# Altium PCB CH32V103R-R1-1v1.PcbDoc (part 1 of 2)
Units mil, origin at the board's own origin, x right, y up, seen from the top; angles counter-clockwise.
Board outline 2913.39 x 3002 mil, 2 copper layers (Top Layer, Bottom Layer); 62 components, 91 nets, 361 pads, 452 vias.
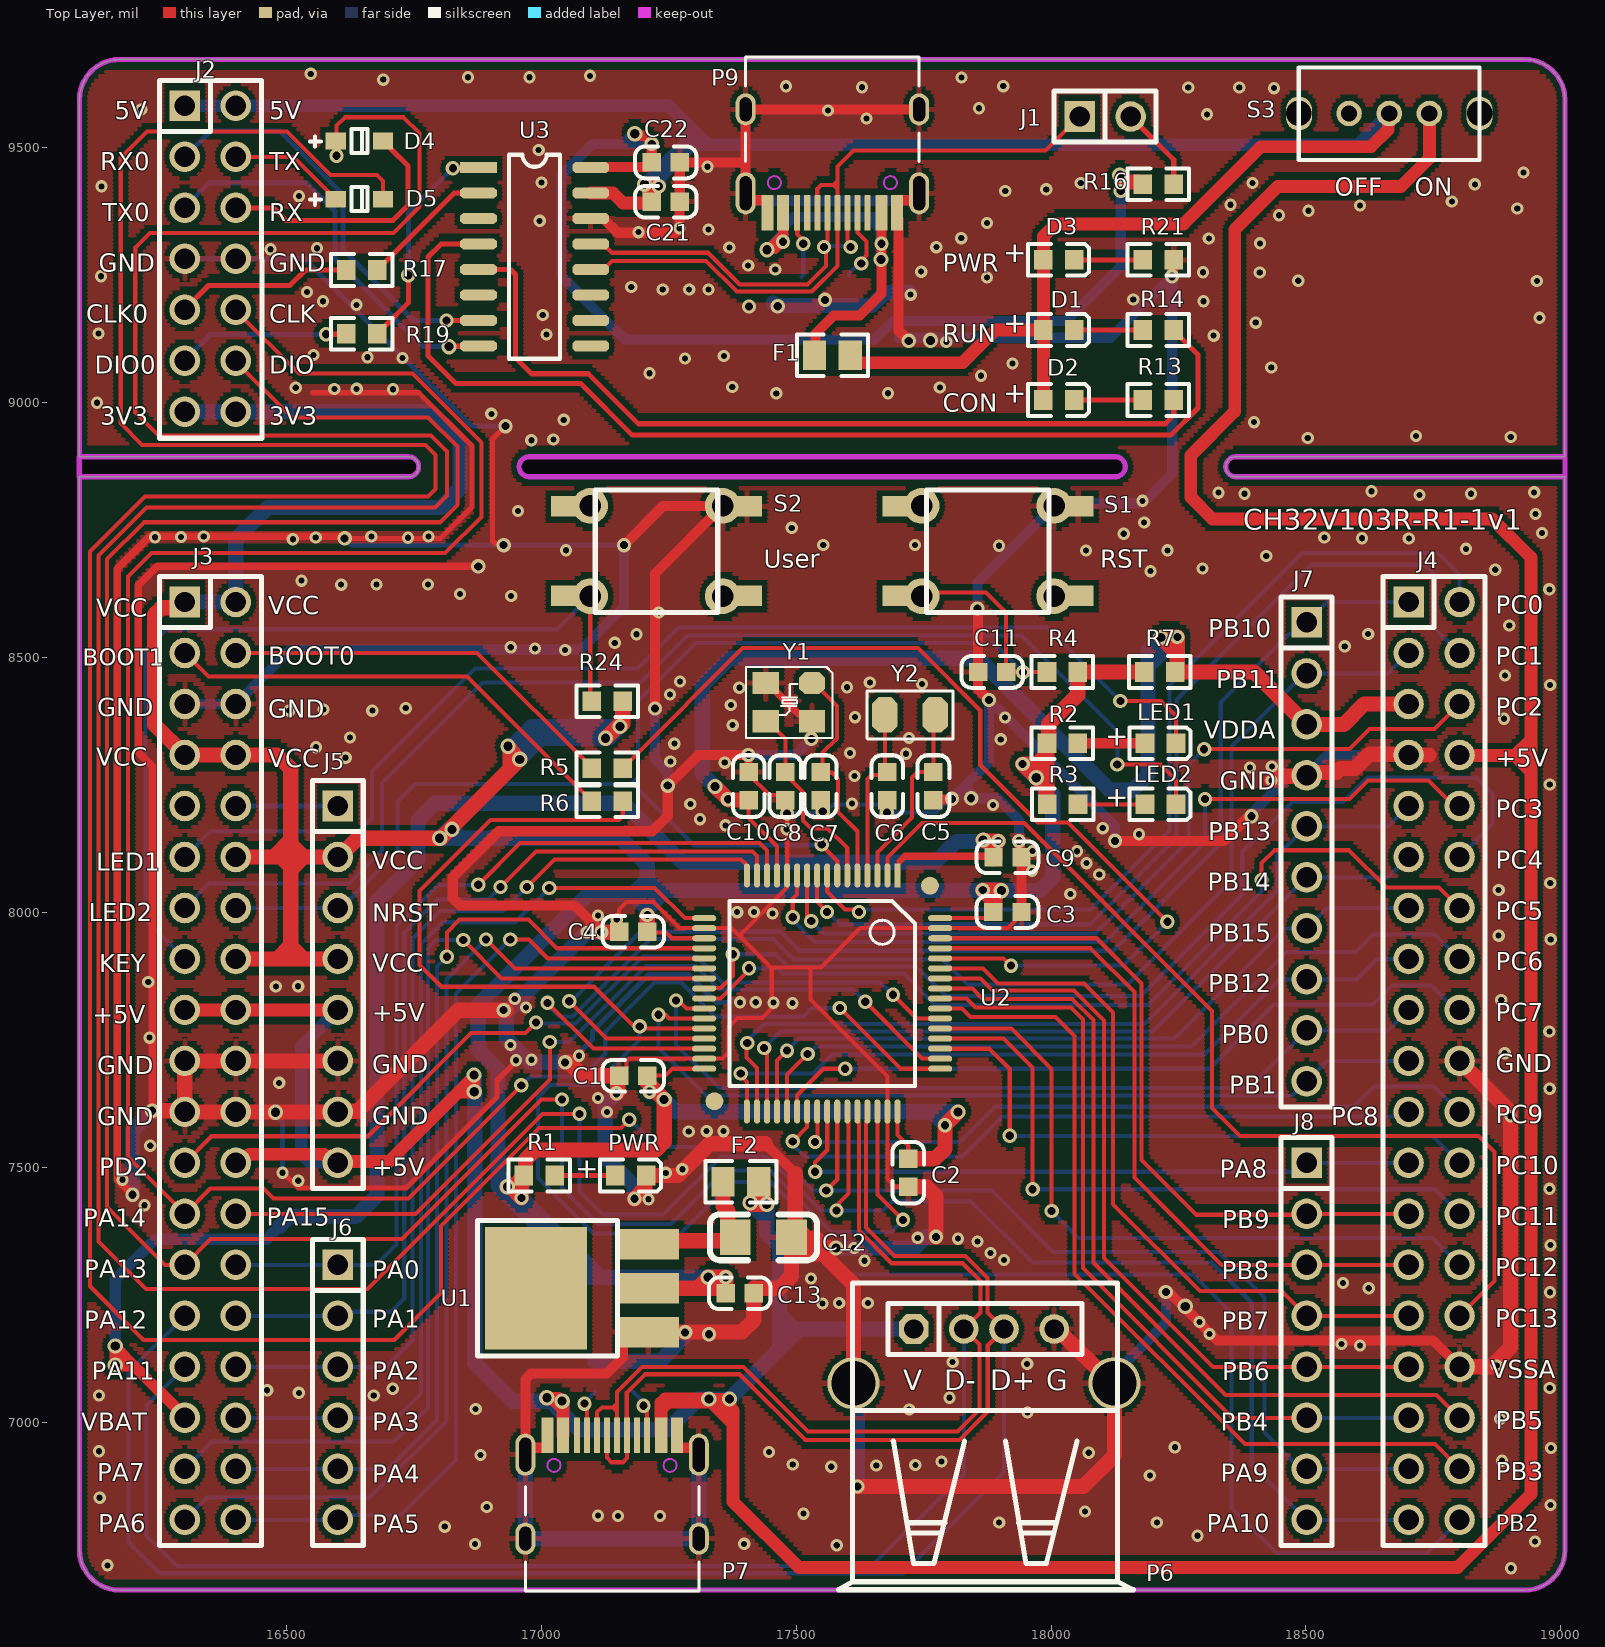
[diagram p0: Top Layer view]
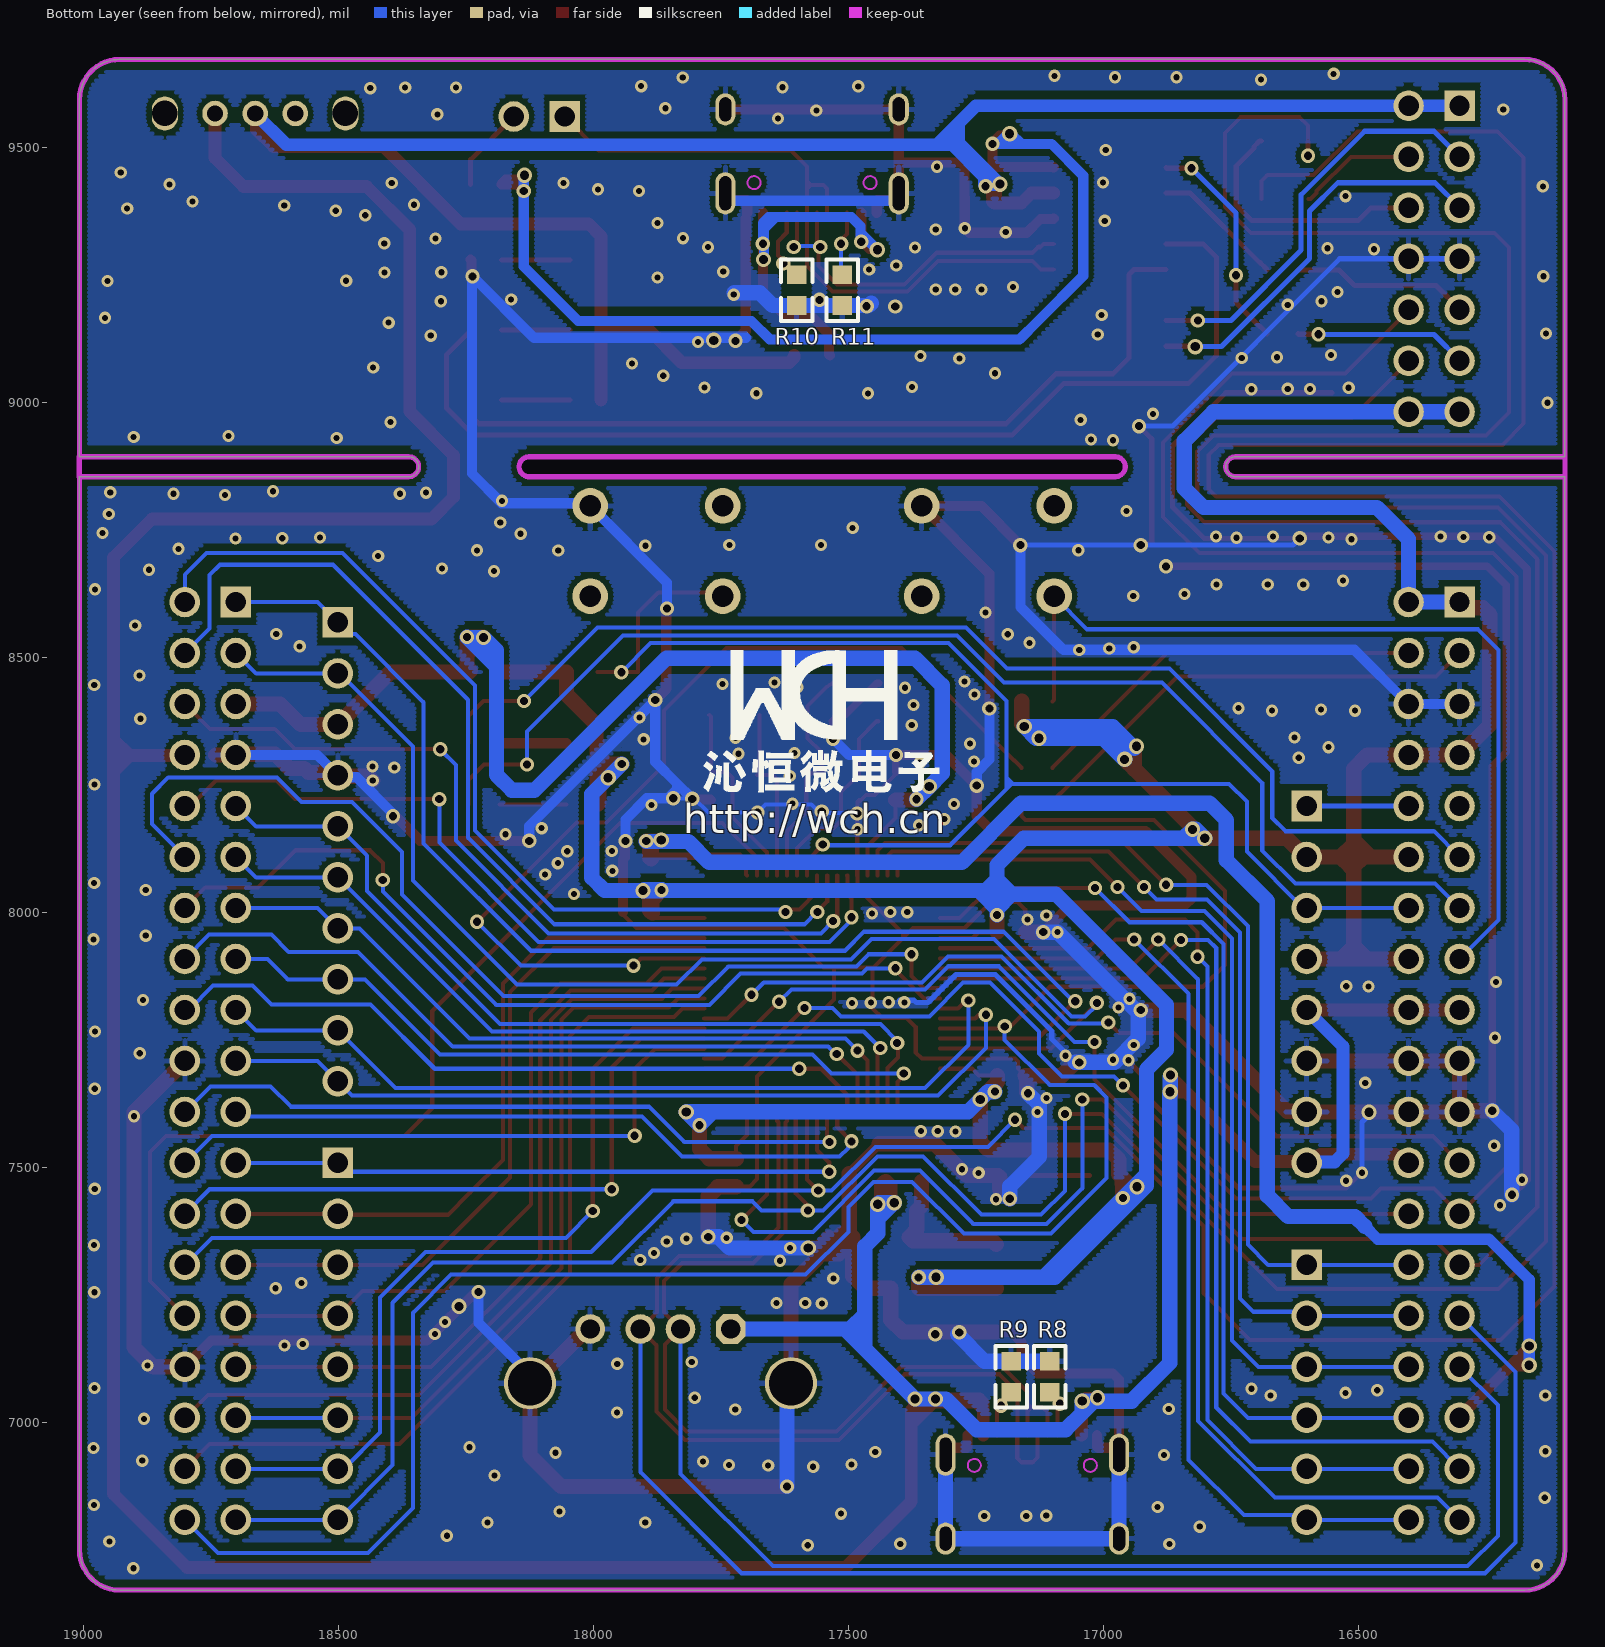
[diagram p1: Bottom Layer view, seen from below]

## Layer stack, top to bottom
Top Solder: solder mask 0.4, Solder Resist, Dk 3.5
Top Layer: signal copper 1.4
Dielectric 1: dielectric 12.6, FR-4, Dk 4.8
Bottom Layer: signal copper 1.4
Bottom Solder: solder mask 0.4, Solder Resist, Dk 3.5

## Board outline
16094.48,6749.74 ccw(c16173.22,6749.74) 16173.22,6671 18929.12,6671 ccw(c18929.12,6749.74) 19007.86,6749.74 19007.86,8854.48 18362.2,8854.48 cw(c18362.2,8874.16) 18362.2,8893.85 19007.86,8893.85 19007.86,9594.26 ccw(c18929.12,9594.26) 18929.12,9673 16173.22,9673 ccw(c16173.22,9594.26) 16094.48,9594.26 16094.48,8893.85 16740.15,8893.85 cw(c16740.15,8874.16) 16740.15,8854.48 16094.48,8854.48
cut-out: 16976.37,8854.48 cw(c16976.37,8874.16) 16976.37,8893.85 18125.97,8893.85 cw(c18125.97,8874.16) 18125.97,8854.48

## Design rules (kind name [scope] priority, off if disabled: settings)
Clearance Clearance_1 [InPolygon] p1: gap=10 ignorepadtopadclearanceinfootprint=FALSE
Clearance [All] p2: gap=6 ignorepadtopadclearanceinfootprint=FALSE
ComponentClearance [All] p1 off: gap=10 collisioncheckmode=3 verticalgap=10 showdistances=FALSE
DiffPairsRouting [All] p1: maxlimit=10 minlimit=7 mostfreqgap=8 toplayer_minwidth=6 toplayer_maxwidth=15 toplayer_prefwidth=8 bottomlayer_minwidth=6 bottomlayer_maxwidth=15 bottomlayer_prefwidth=8 maxuncoupledlength=500
MinimumSolderMaskSliver [All] p1 off: minsoldermaskwidth=10
PolygonConnect PolygonConnect_1 [IsVia] p1: connectstyle=Direct reliefconductorwidth=10 reliefentries=4 polygonreliefangle="90 Angle" airgapwidth=10
PolygonConnect [All] p2: connectstyle=Relief reliefconductorwidth=10 reliefentries=4 polygonreliefangle="90 Angle" airgapwidth=10
RoutingVias [All] p1: holewidth=16 width=28 viastyle="Through Hole" minholewidth=12 minwidth=24 maxholewidth=28 maxwidth=50
SilkToSilkClearance [All] p1 off: silktosilkclearance=10
SilkToSolderMaskClearance [IsPad] p1 off: minsilkscreentomaskgap=10 clearancetoexposedcopper=TRUE
SolderMaskExpansion [All] p1: expansion=4 istentingtop=FALSE
Width [All] p1: maxlimit=100 minlimit=6 preferedwidth=10
25 further rules are at their usual default settings.

## Components (designator, comment, footprint, x,y, rotation, side; value= is the part's Value field where it differs from the comment)
C1 "0.1uF" 0603_C 17153,7680 r0 top
C2 "0.1uF" 0603_C 17720,7462 r90 top
C3 "0.1uF" 0603_C 17942,8001 r180 top
C4 "0.1uF" 0603_C 17153,7962 r0 top
C5 "12pF" 0603_C 17769.31,8275.39 r270 top
C6 "12pF" 0603_C 17678.83,8275.39 r270 top
C7 "22pF" 0603_C 17548,8220.4 r90 top
C8 "22pF" 0603_C 17479,8220.4 r90 top
C9 "0.1uF" 0603_C 17887.02,8108.24 r0 top
C10 "0.1uF" 0603_C 17407,8220.4 r90 top
C11 "0.1uF" 0603_C 17857.02,8471.72 r0 top
C12 "10uF" 3216_C 17381,7363 r180 top
C13 "10uF" 0603_C 17362,7253 r0 top
C21 "0.1uF" 0603_C 17217,9394 r0 top
C22 "0.1uF" 0603_C 17217,9471 r0 top
D1 "GREEN" 0603+ 17985,9142.5 r0 top
D2 "BLUE" 0603+ 17985,9005 r0 top
D3 "RED" 0603+ 17985,9280 r0 top
D4 "B0520" SOD-323 16597.09,9513 r0 top
D5 "B0520" SOD-323 16597.09,9399 r0 top
F1 "500mA" 0805 17536.04,9092.5 r0 top
F2 "500mA" 0805 17426.63,7472 r180 top
J1 "Header 2" SIP2-2.54MM 18056,9561 r90 top
J2 "Header 7X2" IDC14-2.54mm 16301.17,9582 r0 top
J3 "Header 19X2" IDC38-2.54mm 16301.17,8608.81 r0 top locked
J4 "Header 19X2" IDC38-2.54mm 18701.17,8608.81 r0 top locked
J5 "Header 8" SIP8-2.54mm 16601.17,8208.81 r0 top locked
J6 "Header 6" SIP6-2.54MM 16601.17,7308.81 r0 top locked
J7 "Header 10" SIP10-2.54mm 18501.17,8568.81 r0 top locked
J8 "Header 8" SIP8-2.54mm 18501.17,7508.81 r0 top locked
LED1 "LED1   blue" 0603+ 18184.37,8332 r0 top
LED2 "LED2  blue" 0603+ 18184.37,8212 r0 top
P6 "USB_A" USBAF 17730.57,7183.06 r0 top
P7 "TYPE-C" TYPE-C-Receptacle-2.0 17139.08,6974.76 r0 top
P9 "TYPE-C" TYPE-C-Receptacle-2.0 17571.08,9372.24 r180 top
PWR "POWER  red" 0603+ 17145.56,7484 r0 top
R1 "1K" 0603 17026.69,7484 r180 top
R2 "1K" 0603 17992,8332 r0 top
R3 "1K" 0603 17992.37,8212 r0 top
R4 "10K" 0603 17992,8471.72 r0 top
R5 "10K" 0603 17099.37,8283 r0 top
R6 "10K" 0603 17160,8218 r180 top
R7 "0Ω" 0603 18182.99,8471.72 r0 top
R8 "NC(5.1K)" 0603 17104.92,7119.74 r270 bottom
R9 "NC(5.1K)" 0603 17180.53,7119.74 r270 bottom
R10 "NC(5.1K)" 0603 17601.22,9250.91 r270 bottom
R11 "NC(5.1K)" 0603 17511.88,9250.91 r270 bottom
R13 "1K" 0603 18240.63,9005 r180 top
R14 "10K" 0603 18240.63,9142.5 r180 top
R16 "4.7K" 0603 18240.63,9427.99 r180 top
R17 "270" 0603 16618,9260 r0 top
R19 "270" 0603 16618,9135 r0 top
R21 "1K" 0603 18240.63,9280 r180 top
R24 "10K" 0603 17099.37,8414 r0 top
S1 "RESET(Yellow)" KEYX 17746.25,8620.23 r90 top locked
S2 "USER(Blue)" KEYX 17096.25,8620.23 r90 top locked
S3 "SW" KEY2 18505.78,9567 r0 top
U1 "1117-3.3V" SOT-223 17210,7177 r90 top
U2 "CH32V103R" LQFP64M_10X10 17698.81,8072.55 r180 top
U3 "CH549G" SOP16 16877,9461 r270 top
Y1 "8M" XT3225 17531,8449.8 r180 top
Y2 "32.768k" FC-135 17772.64,8387.51 r180 top

## Footprints (in the part's own frame and the unit in brackets; to place one, negate y for a bottom-side part, rotate by r counter-clockwise, add the part's x,y. Pads: shape width x height; smd on the part's side, far side on the other; paste and mask are expansions set on the pad)
0603 [mm]
  rect 0.93x0.98 smd: 1(0,0) 2(1.54,0)
  silkscreen extent -0.76,-0.79 2.3,0.79
0603+ [mm]
  rect 0.93x0.98 smd: 1(0,0) 2(1.54,0)
  silkscreen extent -0.76,-0.79 2.27,0.79
0603_C [mil]
  rect 36x36 smd: 1(0,0) 2(55,0)
  silkscreen extent -33,-31 88,31
0805 [mm]
  rect 1.16x1.47 smd: 1(0,0) 2(1.78,0)
  silkscreen extent -0.88,-1.04 2.66,1.03
3216_C [mil]
  rect 60x70 smd: 1(0,0) 2(-110,0)
  silkscreen extent -160,-45 50,45
FC-135 [mil]
  oct 50x70 smd: 1(0,0) 2(98.43,0)
  silkscreen extent -35,-47 133,47
IDC14-2.54mm [mil]
  rect 60x60 hole 40: 1(0,0)
  round 60 hole 40: 2(100,0) 3(0,-100) 4(100,-100) 5(0,-200) 6(100,-200) 7(0,-300) 8(100,-300) 9(0,-400) 10(100,-400) 11(0,-500) 12(100,-500) 13(0,-600) 14(100,-600)
  silkscreen extent -50,-652 151,50
IDC38-2.54mm [mil]
  rect 60x60 hole 40: 1(0,0)
  round 60 hole 40: 2(100,0) 3(0,-100) 4(100,-100) 5(0,-200) 6(100,-200) 7(0,-300) 8(100,-300) 9(0,-400) 10(100,-400) 11(0,-500) 12(100,-500) 13(0,-600) 14(100,-600) 15(0,-700) 16(100,-700) 17(0,-800) 18(100,-800) 19(0,-900) 20(100,-900) 21(0,-1000) 22(100,-1000) 23(0,-1100) 24(100,-1100) 25(0,-1200) 26(100,-1200) 27(0,-1300) 28(100,-1300) 29(0,-1400) 30(100,-1400) 31(0,-1500) 32(100,-1500) 33(0,-1600) 34(100,-1600) 35(0,-1700) 36(100,-1700) 37(0,-1800) 38(100,-1800)
  silkscreen extent -50,-1850 150,50
KEY2 [mm]
  oval 1.3x1.7 hole 1.27: 0(-0.5,0) 0(8.5,0)
  round 1.27 hole 0.813: 1(4,0) 2(2,0) 3(6,0)
  silkscreen extent -0.51,-2.31 8.5,2.29
KEYX [mil]
  round 70 hole 42: 1(0,0) 2(0,-259.84) 3(177.17,-259.84) 4(177.17,0)
  silkscreen extent -32,-250 208,-10
LQFP64M_10X10 [mm]
  round 0.889 smd: 0(-1.619,0.508) 0(9.119,11.246)
  rect 0.3x1.2 smd: 1(0,0)
  oval 0.3x1.2 smd: 2(0.5,0) 3(1,0) 4(1.5,0) 5(2,0) 6(2.5,0) 7(3,0) 8(3.5,0) 9(4,0) 10(4.5,0) 11(5,0) 12(5.5,0) 13(6,0) 14(6.5,0) 15(7,0) 16(7.5,0) 33(7.5,11.754) 34(7,11.754) 35(6.5,11.754) 36(6,11.754) 37(5.5,11.754) 38(5,11.754) 39(4.5,11.754) 40(4,11.754) 41(3.5,11.754) 42(3,11.754) 43(2.5,11.754) 44(2,11.754) 45(1.5,11.754) 46(1,11.754) 47(0.5,11.754) 48(0,11.754)
  oval 1.2x0.3 smd: 17(9.627,2.127) 18(9.627,2.627) 19(9.627,3.127) 20(9.627,3.627) 21(9.627,4.127) 22(9.627,4.627) 23(9.627,5.127) 24(9.627,5.627) 25(9.627,6.127) 26(9.627,6.627) 27(9.627,7.127) 28(9.627,7.627) 29(9.627,8.127) 30(9.627,8.627) 31(9.627,9.127) 32(9.627,9.627) 49(-2.127,9.627) 50(-2.127,9.127) 51(-2.127,8.627) 52(-2.127,8.127) 53(-2.127,7.627) 54(-2.127,7.127) 55(-2.127,6.627) 56(-2.127,6.127) 57(-2.127,5.627) 58(-2.127,5.127) 59(-2.127,4.627) 60(-2.127,4.127) 61(-2.127,3.627) 62(-2.127,3.127) 63(-2.127,2.627) 64(-2.127,2.127)
  silkscreen extent -0.86,1.26 8.37,10.49
SIP2-2.54MM [mil]
  rect 60x60 hole 40: 1(0,0)
  round 60 hole 40: 2(0,-100)
  silkscreen extent -50,-150 50,50
SIP6-2.54MM [mil]
  rect 60x60 hole 40: 1(0,0)
  round 60 hole 40: 2(0,-100) 3(0,-200) 4(0,-300) 5(0,-400) 6(0,-500)
  silkscreen extent -50,-550 50,50
SIP8-2.54mm [mil]
  rect 60x60 hole 40: 1(0,0)
  round 60 hole 40: 2(0,-100) 3(0,-200) 4(0,-300) 5(0,-400) 6(0,-500) 7(0,-600) 8(0,-700)
  silkscreen extent -50,-750 50,50
SIP10-2.54mm [mil]
  rect 60x60 hole 40: 1(0,0)
  round 60 hole 40: 2(0,-100) 3(0,-200) 4(0,-300) 5(0,-400) 6(0,-500) 7(0,-600) 8(0,-700) 9(0,-800) 10(0,-900)
  silkscreen extent -50,-950 50,50
SOD-323 [mm]
  rect 1x0.83 smd: 1(0,0) 2(2.36,0)
  silkscreen extent -1.28,-0.6 1.58,0.6
SOP16 [mil]
  rect 22x72 smd: 1(0,0)
  oct 22x72 smd: 2(50,0) 3(100,0) 4(150,0) 5(200,0) 6(250,0) 7(300,0) 8(350,0) 9(350,220) 10(300,220) 11(250,220) 12(200,220) 13(150,220) 14(100,220) 15(50,220) 16(0,220)
  silkscreen extent -25,60 375,160
SOT-223 [mil]
  rect 60x120 smd: 1(0,0) 2(86,0) 3(172,0)
  rect 240x200 smd: ""(86,220)
  silkscreen extent -47,60 219,335
TYPE-C-Receptacle-2.0 [mm]
  oval 1x1.6 hole 0.6 slot 1.2 at 90 deg: 0(-4.32,-5.15) 0(4.32,-5.15)
  oval 1x2.1 hole 0.6 slot 1.7 at 90 deg: 0(-4.32,-0.97) 0(4.32,-0.97)
  rect 0.6x1.75 smd: A1(-3.225,0) A4(-2.45,0) B1(3.225,0) B4(2.45,0)
  rect 0.3x1.75 smd: A5(-1.25,0) A6(-0.25,0) A7(0.25,0) A8(1.25,0) B5(1.75,0) B6(0.75,0) B7(-0.75,0) B8(-1.75,0)
  Keep-Out Layer circle w0.1: c2.89,-1.5 r0.325
  Keep-Out Layer circle w0.1: c-2.89,-1.5 r0.325
  silkscreen extent -4.32,-7.75 4.32,-2.55
USBAF [mm]
  round 2.6 hole 2.2: 0(-3,-2.7) 0(10,-2.7)
  oct 1.473x1.473 hole 0.965: 1(0,0)
  round 1.473 hole 0.965: 2(2.5,0) 3(4.5,0) 4(7,0)
  silkscreen extent -3.75,-12.99 10.95,2.29
XT3225 [mm]
  oct 1.3x1.1 smd: 1(0,0)
  rect 1.3x1.1 smd: 2(2.3,0) 3(2.3,1.9) 4(0,1.9)
  silkscreen extent -1.02,-0.8 3.27,2.74

## Part data
C1 C2 C3 C4 C5 C6 C7 C8 C9 C10 C11: library part Cap, "Capacitor"
C12 C13: library part CAP, "Capacitor"
C21 C22: library part C0603, "Capacitor", LatestRevisionDate=17-Jul-2002, LatestRevisionNote="Re-released for DXP Platform.", PackageDescription="Radial Cap, Thru-Hole; 2 Leads; 0.3 in Pin Spacing", PackageReference=RAD-0.3, Published=8-Jun-2000, Publisher="Altium Limited"
D1 D2 D3: library part D0603, "Typical RED, GREEN, YELLOW, AMBER GaAs LED", LatestRevisionDate=17-Jul-2002, LatestRevisionNote="Re-released for DXP Platform.", PackageDescription="SM LED; 2 Flat Leads", PackageReference=3.2X1.6X1.1, PackageVersion=Feb-2002, Published=8-Jun-2000, Publisher="Altium Limited"
D4 D5: library part DIODE, "Diode"
F1 F2: library part FUSE1, "Fuse"
J1: "Header, 2-Pin", LatestRevisionDate=17-Jul-2002, LatestRevisionNote="Re-released for DXP Platform.", Publisher="Altium Limited"
J2: "Header, 7-Pin, Dual row", LatestRevisionDate=17-Jul-2002, LatestRevisionNote="Re-released for DXP Platform.", Publisher="Altium Limited"
J3 J4: "Header, 19-Pin, Dual row", LatestRevisionDate=17-Jul-2002, LatestRevisionNote="Re-released for DXP Platform.", Publisher="Altium Limited"
J5 J8: "Header, 8-Pin", LatestRevisionDate=17-Jul-2002, LatestRevisionNote="Re-released for DXP Platform.", Publisher="Altium Limited"
J6: "Header, 6-Pin", LatestRevisionDate=17-Jul-2002, LatestRevisionNote="Re-released for DXP Platform.", Publisher="Altium Limited"
J7: "Header, 10-Pin", LatestRevisionDate=17-Jul-2002, LatestRevisionNote="Re-released for DXP Platform.", Publisher="Altium Limited"
LED1 LED2 PWR: library part LED0, "Typical INFRARED GaAs LED", LatestRevisionDate=08-Jul-2005, LatestRevisionNote="Mech Layer 1 removed.", PackageReference=LED-0, Published=8-Jun-2000, Publisher="Altium Limited"
P6: library part USB, "USB Port"
P7 P9: library part TYPE-C1
R1 R2 R3: library part "Res Semi", "Semiconductor Resistor"
R4 R5 R6 R7 R8 R9 R10 R11 R24: library part Res2, "Resistor"
R13 R14 R16 R17 R19 R21: library part R0603, "Resistor", LatestRevisionDate=17-Jul-2002, LatestRevisionNote="Re-released for DXP Platform.", PackageDescription="Axial Device, Thru-Hole; 2 Leads; 0.3 in Pin Spacing", PackageReference=AXIAL-0.3, Published=8-Jun-2000, Publisher="Altium Limited"
S1 S2: library part "SW PUSHBUTTON", "SE PUSHBUTTON"
U2: "RISC-V MCU with USB device & USB host & ADC & Touch Key"
U3: "8bit MCS51 MCU with ADC & USB type-C host & device & dual UART & SPI"
Y1 Y2: library part XTAL, "Crystal Oscillator", LatestRevisionDate=17-Jul-2002, LatestRevisionNote="Re-released for DXP Platform.", PackageReference=R38, Published=8-Jun-2000, Publisher="Altium Limited"

## Free pads (board coordinates)
  rect 60x40 smd mask+4: ""(17049.01,8621.31) ""(17049.01,8796.31) ""(17403.34,8621.31) ""(17403.34,8796.31) ""(17699.01,8621.31) ""(17699.01,8796.31) ""(18053.34,8621.31) ""(18053.34,8796.31)

## Via types
v1: diameter 24, hole 12, Top Layer to Bottom Layer, tented both sides, 303 vias
v2: diameter 28, hole 16, Top Layer to Bottom Layer, tented both sides, 114 vias
v3: diameter 30, hole 18, Top Layer to Bottom Layer, tented both sides, 35 vias

## Nets (pads, with @x,y where several pads share a name; then routed paths per layer and width w, separated by ;. In a path a pad name is that pad's centre, name@x,y a point inside that pad or via, vN(x,y) a via of type N, cw(c..) or ccw(c..) an arc to the next point about the centre after c; other vN are vias at no path point)
5V: C21.1 D1.1 D2.1 D3.1 F1.2 J2.1 J2.2 S3.1 U3.15 | length 4520.2
  Top Layer w25: U3.15@17097,9411 17140.75,9411 17160.32,9391.43 17214.43,9391.43 C21.1@17217,9394 17211.5,9399.5 17211.5,9418.11 17202.59,9427.02 v3(17202.59,9428.37) 17203.55,9427.41 17226.66,9427.41 17229.77,9424.3 v2(17230.59,9424.3) ; C21.1@17217.48,9403.52 17217,9404 17217.17,9404.17 17217.17,9426.32 v2@17218.15,9427.3 ; F1.2@17606.12,9092.5 17606.12,9088.44 17616.45,9078.1 17826.66,9078.1 17891.06,9142.5 D1.1@17985,9142.5 ; D2.1@17985,9005 D1.1@17985,9142.5 ; S3.1@18663.26,9567 18661.3,9565.04 18661.3,9535.75 18627.45,9501.91 18411.76,9501.91 18259.95,9350.1 18008.76,9350.1 17985,9326.34 D3.1@17985,9280 D1.1@17985,9142.5
  Bottom Layer w25: J2.1@16300,9582 J2.2@16401.17,9582 17249.76,9582 17283.46,9548.3 ; v2(17230.59,9424.3) 17229.77,9424.3 17226.66,9427.41 17203.55,9427.41 v3(17202.59,9428.37) 17283.46,9509.24 17283.46,9548.3 ; v2@17233.59,9427.3 17233.59,9442.73 17296.76,9505.9 ; S3.1@18663.26,9567 18602.16,9505.9 17325.86,9505.9 ; 17283.46,9548.3 17296.76,9535.01 ; 17296.76,9505.9 17325.86,9505.9 ; 17296.76,9505.9 17296.76,9535.01 ; 17296.76,9535.01 17325.86,9505.9
5V_USB: F1.1 P9.A4 P9.B4 | length 919.8
  Top Layer w20: v3@17440.11,9296.56 v3@17443.34,9299.79 ; v3(17442.97,9299.79) v3@17443.34,9299.79 ; P9.B4@17474.62,9372.24 P9.B4@17474.62,9372.24 v2@17474.56,9329.15 ; 17475.4,9329.99 v2@17474.56,9329.15 ; F1.1@17536.04,9092.5 17538.04,9094.5 17538.04,9134.97 17573.92,9170.86 17624.76,9170.86 17667.54,9213.63 17667.54,9275.63 17667.54,9280.45 17667.54,9281.13 v2(17667.53,9311.59) P9.A4@17667.54,9372.24 ; v3@17443.34,9299.79 17445.2,9299.79 v3@17447.12,9301.7 ; v3@17443.34,9299.79 17445.25,9301.7 v3@17447.12,9301.7 ; v3@17447.12,9301.7 17458.46,9301.7 17472.33,9315.57 v2(17474.5,9315.57) 17474.56,9315.63 v2@17474.56,9329.15 ; v3@17447.12,9301.7 v2@17474.56,9329.15
  Bottom Layer w20: v3(17442.97,9299.79) 17476.03,9332.85 ; v2(17474.5,9315.57) 17476.03,9317.1 17476.03,9332.85 ; 17643.55,9362.92 17665.36,9341.11 v3@17665.36,9282.03 ; v2(17667.53,9311.59) 17667.53,9352.06 17655.91,9363.68 17493.75,9363.68 17476.03,9345.96 17476.03,9332.85
  other v3: 17666.36,9280.45
+5V: F2.1 J3.17 J3.18 J3.24 J4.8 J5.5 J5.8 P6.1 P7.A4 P7.B4 S3.3 | length 9848.9
  Top Layer w25: J3.17@16301.17,7808.81 J3.18@16401.17,7808.81 J5.5@16601.17,7808.81 ; J3.24@16401.17,7508.81 16410.64,7508.81 16427.81,7525.98 16574.53,7525.98 16591.7,7508.81 J5.8@16601.17,7508.81 16603.88,7511.52 16701.62,7511.52 16837.98,7647.88 ; v3@16861.17,7647.88 16837.98,7647.88 ; v3@16868.21,7678.11 16837.98,7647.88 ; v3(16868.21,7681.11) 16868.36,7680.96 16868.36,7649 v3(16868.84,7648.52) ; v3(17011.23,7048.14) 17012.19,7047.18 v3@17020.74,7047.18 ; v3@17029.46,7040.16 17042.42,7027.2 17042.42,6974.96 P7.A4@17042.62,6974.76 17042.62,7038.72 17040.17,7041.17 v3@17040.17,7042.53 ; v3(17041.13,7041.57) v3@17040.17,7042.53 ; v3(17328.94,7045.81) 17242.65,7045.81 17235.06,7038.22 17235.06,6975.23 P7.B4@17235.54,6974.76 17235.54,7026.27 17248.72,7039.46 v3@17333.84,7039.46 ; 17369.2,7023.36 17369.2,7004.09 ; S3.3@18742,9567 18742,9479.49 18686.23,9423.72 18444.66,9423.72 18360.04,9339.11 18360.04,8982.26 18274.12,8896.34 18274.12,8814.55 18316.79,8771.88 18865.44,8771.88 18941.11,8696.21 18941.11,8339.37 ; J4.8@18801.17,8308.81 18802.38,8307.6 18909.34,8307.6 ; v3@17020.74,7047.18 17034.16,7047.18 v3@17038.82,7042.53 ; v3@17020.74,7047.18 17025.4,7042.53 v3@17038.82,7042.53 ; v3@17038.82,7042.53 v3@17040.17,7042.53 ; v3@17333.84,7039.46 17339.23,7044.85 17368.25,7044.85 v3(17369.2,7045.81) 17370.16,7044.85 17370.16,7029.59 17376.4,7023.36 17376.4,6996.9 ; v3@17333.84,7039.46 17369.2,7004.09 ; 17369.2,7004.09 17376.4,6996.9 ; 17376.4,6996.9 17376.4,6844.28 17505.53,6715.14 18796.93,6715.14 18941.11,6859.32 18941.11,8279.75 ; 18909.34,8307.6 18937.2,8279.75 18941.11,8279.75 ; 18909.34,8307.6 18941.11,8339.37 ; 18909.34,8307.6 18941.11,8307.6 ; 18941.11,8279.75 18941.11,8307.6 ; 18941.11,8307.6 18941.11,8339.37
  Top Layer w30: v3(17410.01,7430.61) 17412.71,7427.91 v3(17442.38,7427.91) 17434.46,7435.83 17434.46,7464.17 F2.1@17426.63,7472 17418.8,7464.17 17418.8,7439.4 v3(17410.01,7430.61)
  Bottom Layer w25: J5.8@16601.17,7508.81 16599.37,7510.61 16546.17,7510.61 16529.56,7527.22 16529.56,7737.2 J5.5@16601.17,7808.81 ; 16869.52,7604.84 16871.56,7602.8
  Bottom Layer w30: v3@16868.21,7678.11 16868.84,7677.48 v3(16868.84,7648.52) v3@16868.84,7642.52 ; v3@16869.52,7642.8 16869.52,7604.84 16869.52,7116.23 16944.18,7041.57 v3@17004.66,7041.57 ; v3(17011.23,7048.14) v3@17004.66,7041.57 ; v3(17410.01,7430.61) v3@17410.97,7430.61 ; P6.1@17730.57,7183.06 17506.46,7183.06 ; v3@17004.66,7041.57 v3@17017.8,7041.57 ; v3@17017.8,7041.57 17041.13,7018.24 ; v3@17017.8,7041.57 v3(17041.13,7041.57) 17041.13,7018.24 ; 17041.13,7018.24 17073.75,6985.62 17248.59,6985.62 17308.78,7045.81 v3(17369.2,7045.81) 17467.54,7144.14 ; v3@17410.97,7430.61 17442.38,7399.21 ; v3@17410.97,7430.61 17439.68,7430.61 v3(17442.38,7427.91) 17442.38,7399.21 ; 17442.38,7399.21 17442.38,7370.5 17467.54,7345.34 17467.54,7212.02 ; 17467.54,7144.14 17467.54,7212.02 ; 17467.54,7144.14 17506.46,7183.06 ; 17467.54,7212.02 17496.5,7183.06 17506.46,7183.06
BOOT0: R5.2 U2.60 | length 1937.8
  Top Layer w8: R5.2@17160,8283 17160,8283.98 17174.31,8298.29 17175.29,8298.29 17395.33,8518.33 17738.63,8518.33 17861.17,8395.8 17861.17,8289.49 17973.95,8176.71 18033.15,8176.71 v2(18228.11,7981.75) ; U2.60@17782.55,7910.07 17906.96,7910.07 v2(17921.32,7895.71)
  Bottom Layer w8: v2(17921.32,7895.71) 18142.07,7895.71 v2(18228.11,7981.75)
BOOT1: J4.38 R6.1 U2.28 | length 4150.8
  Top Layer w8: R6.1@17160,8218 17160,8188.94 17152.25,8181.19 16900.57,8181.19 16761.46,8042.08 16761.46,7999.38 16761.46,7896.99 16804.14,7854.31 17104.05,7854.31 17181.77,7776.59 v2(17193.27,7776.59) 17197.58,7772.27 U2.28@17319.79,7772.27
  Bottom Layer w8: v2(17193.27,7776.59) 17193.27,7749.77 17104.83,7661.33 17017.62,7661.33 16993.53,7637.24 16993.53,7479.18 17102.47,7370.24 17273.4,7370.24 17374.86,7471.69 17450.27,7471.69 17499.94,7422.02 17499.94,7373.42 17583.54,7289.83 18278.83,7289.83 18353.78,7214.88 18353.78,6831.89 18441.83,6743.84 18736.2,6743.84 J4.38@18801.17,6808.81
CLK: J2.10 J3.25 U2.49 | length 4568.1
  Top Layer w8: J2.10@16400,9182 16525.31,9056.69 16747.35,9056.69 16882.75,8921.29 16882.75,8775.87 16811.59,8704.71 16235.42,8704.71 16189.4,8658.69 16189.4,7520.58 J3.25@16301.17,7408.81 16351.02,7458.65 16455.7,7458.65 16475.17,7439.18 16739.37,7439.18 v2(16961.1,7660.91) ; v2(17585.83,7812.74) 17705.04,7693.53 U2.49@17782.55,7693.53
  Bottom Layer w8: v2(16961.1,7660.91) 16978.66,7678.46 17080.49,7678.46 17125.75,7723.72 17125.75,7766.09 17222.09,7862.43 17274.77,7862.43 17340.98,7796.23 17514.06,7796.23 17530.58,7812.74 v2(17585.83,7812.74)
CLK0: J2.9 R17.1 | length 350.3
  Top Layer w10: J2.9@16300,9182 16347.49,9229.49 16507.13,9229.49 16537.64,9260 R17.1@16618,9260
D_SWCLK: R17.2 U3.2 | length 261.5
  Top Layer w10: R17.2@16678.63,9260 16678.63,9260.98 16691.94,9274.29 16692.92,9274.29 16829.63,9411 U3.2@16877,9411
D_SWDIO: R19.2 U3.1 | length 437.3
  Top Layer w10: R19.2@16678.63,9135 16678.63,9135.98 16691.94,9149.29 16692.92,9149.29 16739.44,9195.81 v2(16739.44,9249.66) ; v2(16826.79,9459.54) 16875.54,9459.54 U3.1@16877,9461
  Bottom Layer w10: v2(16739.44,9249.66) 16739.44,9372.19 v2(16826.79,9459.54)
DIO: J2.12 J3.27 U2.46 | length 4902.1
  Top Layer w8: J2.12@16400,9082 16511.15,8970.85 16778.5,8970.85 16835.56,8913.78 16835.56,8799.56 16801.26,8765.25 16221.26,8765.25 16148.78,8692.76 16148.78,7422.68 16262.64,7308.81 J3.27@16301.17,7308.81 16351.86,7359.5 16727.42,7359.5 17000.92,7633 v2(17041,7633) ; U2.46@17659.44,7609.79 17659.44,7447.21 v2(17709.46,7397.19)
  Bottom Layer w8: v2(17041,7633) 17041,7459.18 17111.38,7388.8 17254.85,7388.8 17359.7,7493.65 17449.26,7493.65 17569.48,7373.43 17685.71,7373.43 v2(17709.46,7397.19)
DIO0: J2.11 R19.1 | length 340
  Top Layer w10: v2(16577.87,9134.02) 16617.02,9134.02 R19.1@16618,9135
  Bottom Layer w10: J2.11@16300,9082 16351.4,9133.4 16577.24,9133.4 v2(16577.87,9134.02)
GND: C1.1 C2.1 C3.1 C4.1 C5.2 C6.2 C7.1 C8.1 C9.2 C10.2 C11.1 C12.2 C13.2 C21.2 C22.2 J2.7 J2.8 J3.5 J3.6 J3.19 J3.20 J3.21 J3.22 J4.7 J4.20 J4.32 J5.6 J5.7 J7.4 P6.0 P6.4 P7.0 P7.A1 P7.B1 P9.0 P9.A1 P9.B1 pad.@17403.34,8796.31 pad.@18053.34,8796.31 PWR.2 R8.1 R9.1 R10.2 R11.2 R21.1 S1.3 S2.3 U1.1 U2.12 U2.18 U2.31 U2.47 U2.63 U3.14 Y1.2 Y1.4 | length 26679.1
  Top Layer w8: C4.1@17152.43,7961.43 C4.1@17153,7962 17153,8005.55 17167.82,8020.36 17220.35,8020.36 17271.59,7969.12 U2.18@17319.79,7969.12 17373.21,7969.12 17392.6,7949.73 ; C1.1@17153,7680 17167,7694 17167,7707.58 17172.64,7713.22 U2.31@17319.79,7713.22 17355.31,7713.22 17367.75,7725.65 17367.75,7775.59 17385.37,7793.21 17433.37,7793.21 17452.19,7812.04 17452.19,7890.14 17450.55,7891.79 ; C10.2@17407,8271 17448,8230 17465,8230 C8.1@17476.8,8218.2 ; C8.1@17479,8220.4 17482.27,8217.13 v2(17482.27,8193.98) ; U2.12@17482.27,8072.55 17481.54,8071.82 17481.54,8047.91 17392.6,7958.97 17392.6,7949.73 ; C2.1@17720,7462 17694.18,7462 17679.12,7477.05 U2.47@17679.12,7609.79 17679.12,7678.22 17528.03,7829.32 17528.03,7891.79 ; C3.1@17942,7996 17915.12,7969.12 U2.63@17782.55,7969.12 17625.81,7969.12 17548.48,7891.79 17528.03,7891.79 ; 17392.6,7949.73 17450.55,7891.79 ; 17450.55,7891.79 17528.03,7891.79
  Top Layer w9: U2.12@17482.27,8072.55 v2(17482.27,8193.98)
  Top Layer w10: v1@16493.8,7489.57 16523.44,7459.92 16735.85,7459.92 16913.32,7637.4 16913.32,7670.55 16950.51,7707.74 v1(16950.51,7710.21) ; 16551.16,9019.19 16594.38,9019.19 16638.12,9019.19 16709.57,9019.19 16759.88,9019.19 16864.2,8914.87 16864.2,8795.33 16802.54,8733.68 16778.84,8733.68 16738.65,8733.68 16666.92,8733.68 v2(16614.63,8733.68) ; 16904.8,8727.6 16904.8,8929.61 ; 16905.8,8727.6 16910.19,8723.21 16923.63,8723.21 v2(16926.38,8720.46) ; 16905.8,8929.61 v2(16929.92,8953.73)
  Top Layer w15: v2(16198.52,7446.25) 16168.9,7475.87 16168.9,8673.85 16232.87,8737.82 v2@16604.59,8737.82 ; v2(16237.01,7611.07) 16237.01,8286.43 16209.52,8313.92 16209.52,8641.58 16246.75,8678.81 v2(16876.69,8678.81) ; v2(17406.34,8308.61) 17406.67,8308.28 17406.67,8275.73 C10.2@17407,8275.4 ; Y1.2@17440.45,8449.8 17444.39,8449.8 17505.04,8389.15 17516.85,8389.15 Y1.4@17531,8375 17529.98,8373.98 v2(17529.98,8340.49)
  Top Layer w20: P7.0@16969,6936.57 P7.0@16969,6941.36 ; P7.A1@17012.11,6974.76 17012.11,6952.12 17010.3,6950.31 16977.95,6950.31 P7.0@16969,6941.36 ; U3.14@17097,9361 17098,9360 17123,9360 17149.98,9333.02 17262.63,9333.02 v1(17271.41,9341.8) 17271.41,9403.41 17272,9404 C22.2@17272,9468 ; v2(17117.64,7961.43) 17065.54,8013.53 16841.15,8013.53 16826.65,8028.03 16826.65,8069.07 16916.86,8159.28 17218.09,8159.28 17248.12,8189.31 v2(17248.12,8248.78) 17307.95,8308.61 v2(17406.34,8308.61) ; v2(17162.48,8720.46) 17239.41,8797.39 S2.3@17356.09,8797.39 17223.29,8664.59 v2(17223.29,8400.04) ; U1.1@17210,7177 17180,7177 17160,7157 17160,7127.23 17128.6,7095.83 16980.7,7095.83 16969,7084.13 P7.0@16969,6941.36 ; P7.B1@17266.05,6974.76 17266.05,6952.12 17267.86,6950.31 17300.21,6950.31 17309.16,6941.36 P7.0@17309.16,6936.57 ; C22.2@17272,9471 17395.46,9471 17401,9476.54 ; 17439.9,7546.18 17498.13,7487.96 ; P9.B1@17444.11,9372.24 17444.11,9394.88 17442.3,9396.69 17409.95,9396.69 17401,9405.64 P9.0@17401,9410.43 17401,9476.54 ; P9.A1@17698.05,9372.24 17698.05,9394.88 17699.86,9396.69 17732.21,9396.69 17741.16,9405.64 P9.0@17741.16,9410.43 ; P9.A1@17700.77,9361.24 17701,9361.01 17701,9141 v2(17721,9121) ; P9.0@17741.16,9575 P9.0@17401,9575 17401,9476.54 ; C5.2@17769.31,8220.39 17770.54,8221.61 17804.66,8221.61 v2(17805.88,8222.84) ; v2(17855.49,8596.04) 17857.02,8594.5 C11.1@17857.02,8471.72 17857.02,8438.04 v2(17878.52,8416.54) ; v2(17936.97,8140.27) 17938.51,8138.74 17938.51,8107.75 17942.02,8104.24 C3.1@17942,8001 ; v2(18125.56,8140.38) 18339.43,8140.38 18387.73,8188.69 v2(18392.98,8188.69) ; v2(18225.18,7255.75) 18230.91,7255.75 v1@18293.05,7193.61 ; v2(18237.14,9247.58) 18238.67,9249.11 18238.67,9278.04 R21.1@18240.63,9280 ; v3(18263.37,7227.41) 18263.37,7224.09 18293.05,7194.41 v1@18293.05,7193.61 ; J4.32@18801.17,7108.81 18749.34,7160.65 18326.02,7160.65 v1@18293.05,7193.61
  Top Layer w30: v2(16237.01,7611.07) 16298.91,7611.07 J3.21@16301.17,7608.81 ; J5.6@16601.17,7708.81 J3.20@16401.17,7708.81 J3.19@16301.17,7708.81 J3.21@16301.17,7608.81 ; v2@16931.39,7808.47 v2(16926.39,7808.47) 16838.08,7808.47 16639.72,7610.12 16602.48,7610.12 J5.7@16601.17,7608.81 J3.22@16401.17,7608.81 J3.21@16301.17,7608.81 ; v2@17055,7706 17081,7680 C1.1@17153,7680 17150,7677 17150,7647.66 v2(17147.71,7645.37) ; v2(17117.64,7961.43) C4.1@17152.43,7961.43 ; v2(17183.18,7438.55) 17202.88,7458.25 17202.88,7480.69 PWR.2@17206.19,7484 17268.03,7484 17330.21,7546.18 17439.9,7546.18 ; U1.1@17210,7177 17393.12,7177 17417,7200.88 C13.2@17417,7253 17417,7263 17467.33,7263 17491,7286.67 C12.2@17491,7344.6 ; C12.2@17491,7363 17498.13,7370.13 17498.13,7487.96 ; C12.2@17504.4,7362.17 17504.4,7344.6 17518.21,7330.79 17552.24,7330.79 C12.2@17513.43,7369.6 ; 17537.82,7362.17 17557.91,7342.08 v3(17578.35,7342.08) ; 17560.72,7322.31 17612.46,7270.57 P6.0@17612.46,7076.76 ; v2(17620.25,6874.01) 18063.18,6874.01 18124.28,6935.1 P6.0@18124.28,7076.76 18118.37,7076.76 18012.07,7183.06 P6.4@18006.17,7183.06 ; C2.1@17720,7462 17755.73,7462 17774.54,7443.19 v2(17774.54,7363.79) ; v1(18432.6,8258.65) 18441.17,8267.22 18499.58,8267.22 J7.4@18501.17,8268.81 18506.91,8274.55 18559.11,8274.55 18566.8,8282.24 18596.24,8282.24 18624.44,8310.43 18699.55,8310.43 J4.7@18701.17,8308.81 18741.17,8308.81 ; J4.32@18801.17,7108.81 18863,7108.81 18901,7146.8 18901,7608.98 J4.20@18801.17,7708.81
  Bottom Layer w8: v2(17482.27,8193.98) 17483.65,8195.35 17549.44,8195.35 v2(17552.19,8198.1) 17558.6,8198.1 17572.59,8212.09 17662.03,8212.09 v2(17677.95,8196.17) 17678.22,8195.9 17774.25,8195.9 17802.25,8223.9 17806.94,8223.9 v2(17843.27,8223.9)
  Bottom Layer w10: J2.7@16300,9282 J2.7@16301.17,9282 J2.8@16401.17,9282 16536.06,9282 16864.33,8953.73 v2(16929.92,8953.73) ; v3(16478.89,7608.12) 16478.89,7602.71 16492.53,7589.06 v1(16492.53,7489.56) ; v2(16614.63,8733.68) 16627.85,8720.46 v2(16926.38,8720.46) v2(17162.48,8720.46) ; v2@17055,7706 17101.03,7752.03 17101.03,7767.69 17211.55,7878.21 17288.95,7878.21 17343.8,7823.36 17366.51,7823.36 17370.89,7827.74 v1@17399.01,7827.74
  Bottom Layer w20: J3.5@16301.17,8408.81 J3.6@16401.17,8408.81 16507.46,8515.1 17078.18,8515.1 17162.48,8599.4 v2(17162.48,8720.46) ; v2(17223.29,8400.04) 17223.29,8299.98 17248.12,8275.16 v2(17248.12,8248.78) ; P9.0@17401,9410.43 17401,9404.97 17409.95,9396.02 17732.21,9396.02 17741.16,9404.97 P9.0@17741.16,9410.43 ; v2(17406.34,8308.61) 17498.1,8308.61 v2(17529.98,8340.49) ; 17701,9127 18116.56,9127 v2(18237.14,9247.58) 18237.88,9246.83 18237.88,8860.94 18179.63,8802.69 18011.39,8802.69 S1.3@18006.09,8797.39 17855.49,8646.79 v2(17855.49,8596.04) ; v2(17805.88,8222.84) 17806.94,8223.9 17835.85,8252.8 ; v2(17843.27,8223.9) 17895.17,8223.9 17936.97,8182.09 v2(17936.97,8140.27) ; v2@17848.3,8228.94 17835.85,8241.39 17835.85,8252.8 ; P6.0@18124.28,7076.76 18124.28,7094.46 18225.18,7195.36 v2(18225.18,7255.75) ; v2(18125.56,8140.38) 18125.56,8169.5 v2(17878.52,8416.54) 17878.52,8295.48 17835.85,8252.8 ; v2(18392.98,8188.69) 18392.98,8193.94 18464.16,8265.11 18497.48,8265.11 J7.4@18501.17,8268.81 18541.17,8308.81 J4.7@18701.17,8308.81
  Bottom Layer w30: v2(16198.52,7446.25) 16198.52,7572.59 v2(16237.01,7611.07) ; P7.0@16969,6936.57 P7.0@16969,6772 P7.0@17309.16,6772 P7.0@17309.16,6936.57 ; v2@17055,7706 v2(17047,7706) 16977.91,7706 16931.39,7752.52 16931.39,7808.47 16936.67,7808.47 v1(17089.62,7961.43) v2(17117.64,7961.43) ; R8.1@17104.92,7119.74 R9.1@17180.53,7119.74 17232.84,7119.74 v2@17286,7172.9 ; v2(17147.71,7645.37) 17125.47,7623.13 17125.47,7520.79 17183.18,7463.08 v2(17183.18,7438.55) ; v2@17455.21,9194.73 17459.67,9190.28 R11.2@17511.88,9190.28 R10.2@17601.22,9190.28 17648.38,9190.28 17673.46,9215.36 v1@17723.75,9215.36 ; v3(17578.35,7342.08) v1(17614.02,7342.08) 17732.53,7342.08 17754.24,7363.79 v2(17774.54,7363.79) ; P6.0@17612.46,7076.76 17620.25,7068.98 v2(17620.25,6874.01)
  other v1: 18902.12,6713.86 16149.52,6719.56 17579.61,6759.05 16870.39,6761.61 17398.15,6761.78 18949.21,6766.18 18287.34,6777.65 16810.81,6795.39 17898.19,6803.68 18207.54,6803.74 17150.89,6816.2 17233.31,6816.2 17111.68,6817 17514.36,6820.86 18066.36,6825.22 16893.23,6833.8 18979.46,6837.92 16134.07,6852.08 18193.73,6895.81 17568.94,6912.82 17657.19,6915.14 17733.82,6916.31 17493.48,6917.47 17784.9,6923.27 18884.68,6924.89 16880.93,6936.17 18074.03,6940.32 17447.03,6941.85 16132.94,6943.26 18980.56,6949.71 18242.84,6951.06 18881.19,7006.86 17953.75,7019.25 17721.75,7025.03 16871.56,7026.38 17801.01,7048.18 16132.94,7052.46 16671.68,7052.79 16524.76,7057.84 16462.65,7062.89 16709.04,7065.92 18978.14,7067.55 18874.22,7111.5 17953.17,7114.71 17807,7118.18 18605.75,7150.91 18569.82,7153.78 18310.81,7173.2 18291.09,7196.61 17551.83,7233.28 17584.42,7233.87 17640.72,7233.87 18978.6,7255.18 18622.99,7263 18572.7,7273.06 17529.31,7281.87 17634.18,7316.88 17907.91,7318.43 17881.16,7332.38 18979.36,7347.52 17855.96,7354.48 17817.57,7360.3 17738.48,7361.85 16221.91,7425.78 17210.4,7437.5 18977.77,7458 16523.52,7473.79 16178.9,7475.87 17244.34,7489.38 17276.9,7496.5 16233.27,7542.53 17289.48,7570.45 17324.64,7571.06 17357.76,7571.06 18900.9,7600.35 17128.92,7608.62 17111.3,7635.95 18977.85,7654.37 16486.14,7665.88 16981.02,7711.04 17074.2,7719.06 18889.59,7723.81 16940.06,7740.3 16231.87,7754.5 18977.26,7766.7 16970.21,7813.37 17492.71,7822.17 17455.71,7823.07 17390.01,7823.74 17420.8,7823.9 18882.99,7828.42 16948.27,7830.56 16479.61,7854.68 16523.45,7855.22 16229.5,7863.63 18980.09,7947.29 18877.92,7954.53 17148.34,7985.97 17111.56,7994.28 17453.65,7997.93 17384.45,8000.56 17417.55,8000.94 18037.81,8036.06 18877.92,8044.28 18979.03,8057.76 18094.45,8074.57 17962.72,8081.6 18069.67,8096.69 18051.08,8120.14 17963.69,8120.56 18172.39,8153.48 17481.66,8163.31 18101.31,8165.32 17361.32,8170.82 17311.78,8183.03 17886.02,8210.92 17292.55,8212.61 17609.55,8213.41 18978.15,8251.02 17614.73,8267.44 18390.29,8284.47 18433.03,8286.11 17359.99,8293.77 17253.36,8296.17 16616.55,8303.36 17715.56,8311.23 17605.51,8312.96 16558.25,8324.17 17261.16,8331.12 17901.36,8339.54 17721.32,8342.34 16625.04,8343.32 17375.54,8367.36 18888.48,8379.92 17909.56,8382.45 17615.33,8383.08 16506.05,8395.82 16668.87,8395.82 16572.88,8397.95 16734.5,8400.74 17372.04,8406.67 17252.68,8427.46 17388.64,8440.74 17600.05,8441.77 18978.84,8445.92 17746.8,8448.16 17644.6,8450.78 17272.14,8453.04 18890.17,8464.66 17047.08,8514.92 16988.14,8517.48 16940.3,8520.05 18576.01,8521.94 17144.37,8528.81 17187.18,8545.68 18621.97,8545.92 18898.65,8562.96 17230.75,8588.39 16941.18,8620.42 16840.63,8624.78 18977.22,8633.72 16607.72,8642.93 16677.29,8643.36 16777.97,8643.36 16529.93,8650.71 18194.81,8669.38 18871.23,8672.04 18296.86,8674.82 18422.06,8699.31 17048.79,8710.31 18068.75,8709.92 18228.42,8710.2 18813.72,8713.11 17898.07,8719.22 17553.34,8720.91 17733.31,8720.91 16512.95,8731.86 18701.76,8733.23 18610.08,8734.01 16557.96,8735.32 16738.65,8734.97 16242.87,8735.82 16293.75,8736.34 18536.03,8735.58 16338.26,8737.49 16778.84,8737.14 16666.92,8737.57 18142.51,8742.84 18962.82,8744.23 17491.43,8754.36 18182.57,8765.01 18950.23,8781.71 16954.4,8787.45 18179.32,8807.24 18722.52,8818.89 18379.45,8821.28 18823.57,8821.28 18328.33,8823.28 18947.48,8823.97 18628.27,8826.08 16980.71,8926.09 17023.88,8927.66 18503.4,8930.76 18901.53,8932.58 18715.68,8934.3 18397.8,8961.62 17044.29,8966.12 16902.31,8977.93 16128.78,8999.61 17461.16,9018.15 17680.3,9018.34 16594.38,9026.49 16709.57,9026.05 16638.12,9026.93 16518.61,9029.15 17781.88,9029.35 17374.8,9030.58 17862.87,9052.66 17212.45,9057.52 18431.88,9068.57 17924.36,9076.63 17282.23,9086.54 16728.28,9087.61 16659.26,9088.91 17358.22,9091.38 16553.48,9093.54 17794.69,9119 18318.94,9131.2 17010.72,9133.52 16131.8,9135.58 18401.43,9156.71 18957.72,9166.2 17003.12,9171.52 16638.09,9191.73 16572.01,9198.83 18299.1,9198.72 18161.14,9202.27 17724.65,9211.68 16540.51,9216.81 17238.58,9221.56 17290.24,9221.56 17328.35,9221.56 17176.76,9226.64 18952.7,9238.24 18484.73,9238.85 17874.35,9245.28 16136.81,9247.83 18409.43,9254.97 18298.09,9255.57 17745.27,9256.74 17459.05,9261.18 17405.99,9268.83 16468.94,9300.64 16560.24,9302.57 17369.04,9304.2 17775.06,9304.85 18409.97,9312.3 17823.94,9322.42 18309.48,9321.65 17191.16,9334.19 17328.35,9339.27 17874.35,9352.21 16997.1,9356.46 18447.29,9367.46 18505.16,9376.12 18914.29,9380.86 18606.1,9386.52 18351.76,9387.98 18786.03,9394.16 16525.06,9404.83 17910.24,9414.83 17990.67,9418.2 16137.84,9424.15 18831.17,9428.03 18058.32,9430.5 18395.35,9430.45 17000.68,9431.79 18926.84,9451.23 17326.26,9462.41 16995.07,9495.42 17637.96,9557.16 18305.98,9565.34 17562.68,9572.92 16215.5,9575.04 17858.81,9577.18 18437.5,9616.64 17629.2,9618.43 18269.16,9617.95 18369.11,9617.95 17480.41,9620.18 17906.16,9620.58 16690.42,9633.37 16856.36,9638.04 16977.02,9638.04 17824.62,9637.68 17095.8,9640.84 16548.02,9644.72
  other v2: 17329.31,7172.83 17282.36,7176.54 17407.8,9188.33 17464,9188.94 17556.57,9201.46
  other v3: 17763.78,9122
KEY: J3.15 pad.@17049.01,8621.31 R24.1 S2.1 | length 1760.7
  Top Layer w8: S2.1@17096.25,8620.23 17096.25,8417.12 R24.1@17099.37,8414
  Bottom Layer w8: J3.15@16301.17,7908.81 16224.4,7985.58 16224.4,8514.64 16265.16,8555.4 17031.42,8555.4 S2.1@17096.25,8620.23
LED1: J3.11 LED1.2 | length 2308.5
  Top Layer w8: v2(18135.92,8414.76) 18215.23,8414.76 18245,8384.98 LED1.2@18245,8332
  Bottom Layer w8: J3.11@16301.17,8108.81 16351.71,8159.34 16642.68,8159.34 16668.52,8185.18 16668.52,8276.49 16870.19,8478.16 16973.27,8478.16 17189.04,8478.16 17269.47,8558.59 17992.09,8558.59 v2(18135.92,8414.76)
LED2: J3.13 LED2.2 | length 2446
  Top Layer w8: v2(18130,8290) 18214.38,8290 18245,8259.38 LED2.2@18245,8212
  Bottom Layer w8: J3.13@16301.17,8008.81 16348.95,8056.59 16623.24,8056.59 16688.16,8121.51 16688.16,8253.86 16885.1,8450.79 17017.44,8450.79 17194.51,8450.79 17287.05,8543.33 17941.93,8543.33 18130,8355.27 v2(18130,8290)
LED_CON: R13.1 U3.5 | length 1621.2
  Top Layer w10: U3.5@16877,9261 16939.89,9261 16949.67,9251.22 16949.67,9087.94 16981.02,9056.59 17092.49,9056.59 17190.52,8958.56 18223.99,8958.56 18240.63,8975.2 R13.1@18240.63,9005
LED_RUN: R14.1 U3.4 | length 2072.1
  Top Layer w10: U3.4@16877,9311 16803.9,9311 16778.2,9285.3 16778.2,9091.94 16833.02,9037.12 17077.9,9037.12 17178.85,8936.16 18234.8,8936.16 18288.21,8989.57 18288.21,9093.94 18240.63,9141.52 R14.1@18240.63,9142.5
NetC12_1: C12.1 F2.2 U1.3 | length 297.3
  Top Layer w30: U1.3@17210,7349 17217,7356 17374,7356 C12.1@17366,7364 ; F2.2@17356.55,7472 17356.55,7424.43 17366,7414.98 17366,7378 C12.1@17381,7363
NetD1_2: D1.2 R14.2 | length 134.4
  Top Layer w10: D1.2@18045.63,9142.5 R14.2@18180,9142.5
NetD2_2: D2.2 R13.2 | length 134.4
  Top Layer w10: D2.2@18045.63,9005 R13.2@18180,9005
NetD3_2: D3.2 R21.2 | length 134.4
  Top Layer w10: D3.2@18045.63,9280 R21.2@18180,9280
NetJ1_2: J1.2 R16.1 | length 168.1
  Top Layer w10: J1.2@18156,9561 18240.63,9476.37 R16.1@18240.63,9427.99
NetJ3_3: J3.3 R6.2 | length 919.2
  Top Layer w8: J3.3@16301.17,8508.81 16347.38,8462.6 16854.77,8462.6 17084.08,8233.29 17085.06,8233.29 17099.37,8218.98 R6.2@17099.37,8218
NetJ3_4: J3.4 R5.1 | length 792.3
  Top Layer w8: J3.4@16401.17,8508.81 16874.55,8508.81 17099.37,8283.98 R5.1@17099.37,8283
NetJ3_10: J3.10 J5.1 | length 200
  Bottom Layer w10: J3.10@16401.17,8208.81 J5.1@16601.17,8208.81
NetLED1_1: LED1.1 R2.2 | length 131.7
  Top Layer w20: R2.2@18052.63,8332 LED1.1@18184.37,8332
NetLED2_1: LED2.1 R3.2 | length 131.4
  Top Layer w8: R3.2@18053,8212 LED2.1@18184.37,8212
NetP7_A5: P7.A5 R8.2 | length 98.8
  Top Layer w8: v2@17085.08,7040.67 17089.87,7035.89 P7.A5@17089.87,6974.76
  Bottom Layer w8: v2(17085.08,7036.73) 17090.07,7041.72 17090.07,7044.81 17090.61,7044.81 R8.2@17104.92,7059.11
NetP7_B5: P7.B5 R9.2 | length 95.9
  Top Layer w8: v2@17201.54,7032.55 17207.98,7026.12 P7.B5@17207.98,6974.76
  Bottom Layer w8: R9.2@17180.53,7059.11 17181.51,7059.11 17195.82,7044.81 17195.82,7043.82 17196.72,7042.93 17196.72,7036.38 v2(17200.54,7032.55)
NetP9_A5: P9.A5 R10.1 | length 146
  Top Layer w8: P9.A5@17620.29,9372.24 17620.69,9371.85 17620.69,9333.31 17638.21,9315.79 17638.21,9288.64 17627.67,9278.11 v2(17627.67,9272.69)
  Bottom Layer w8: R10.1@17604.16,9249.94 17604.16,9252.86 17623.99,9272.69 v2(17627.67,9272.69)